# EAGLE board locker-pcb (EAGLE 6.0)
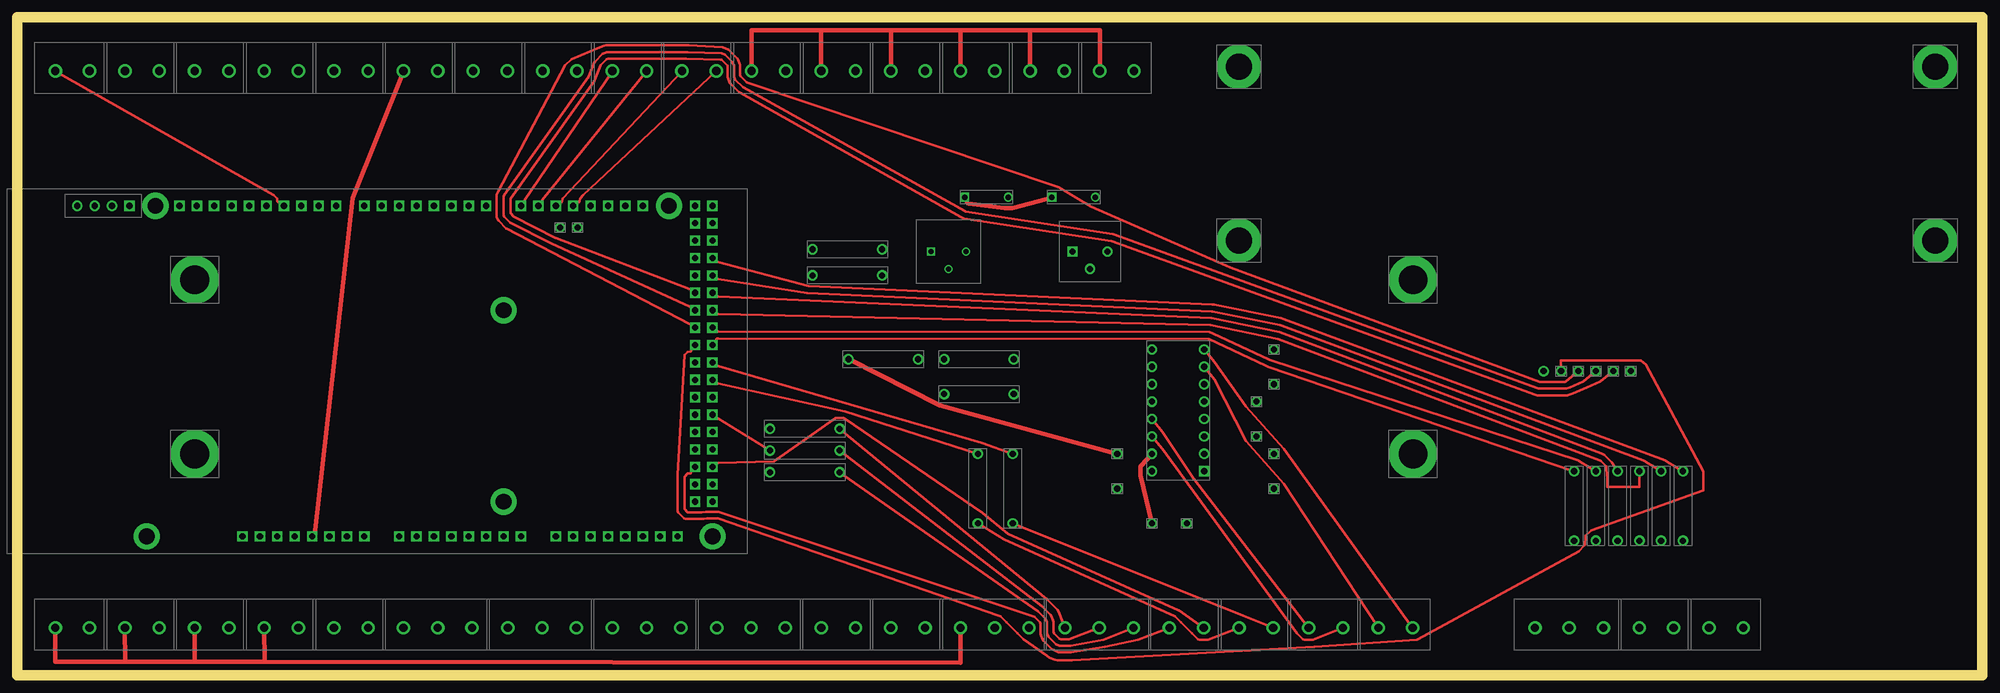
[diagram p0: board, top side]
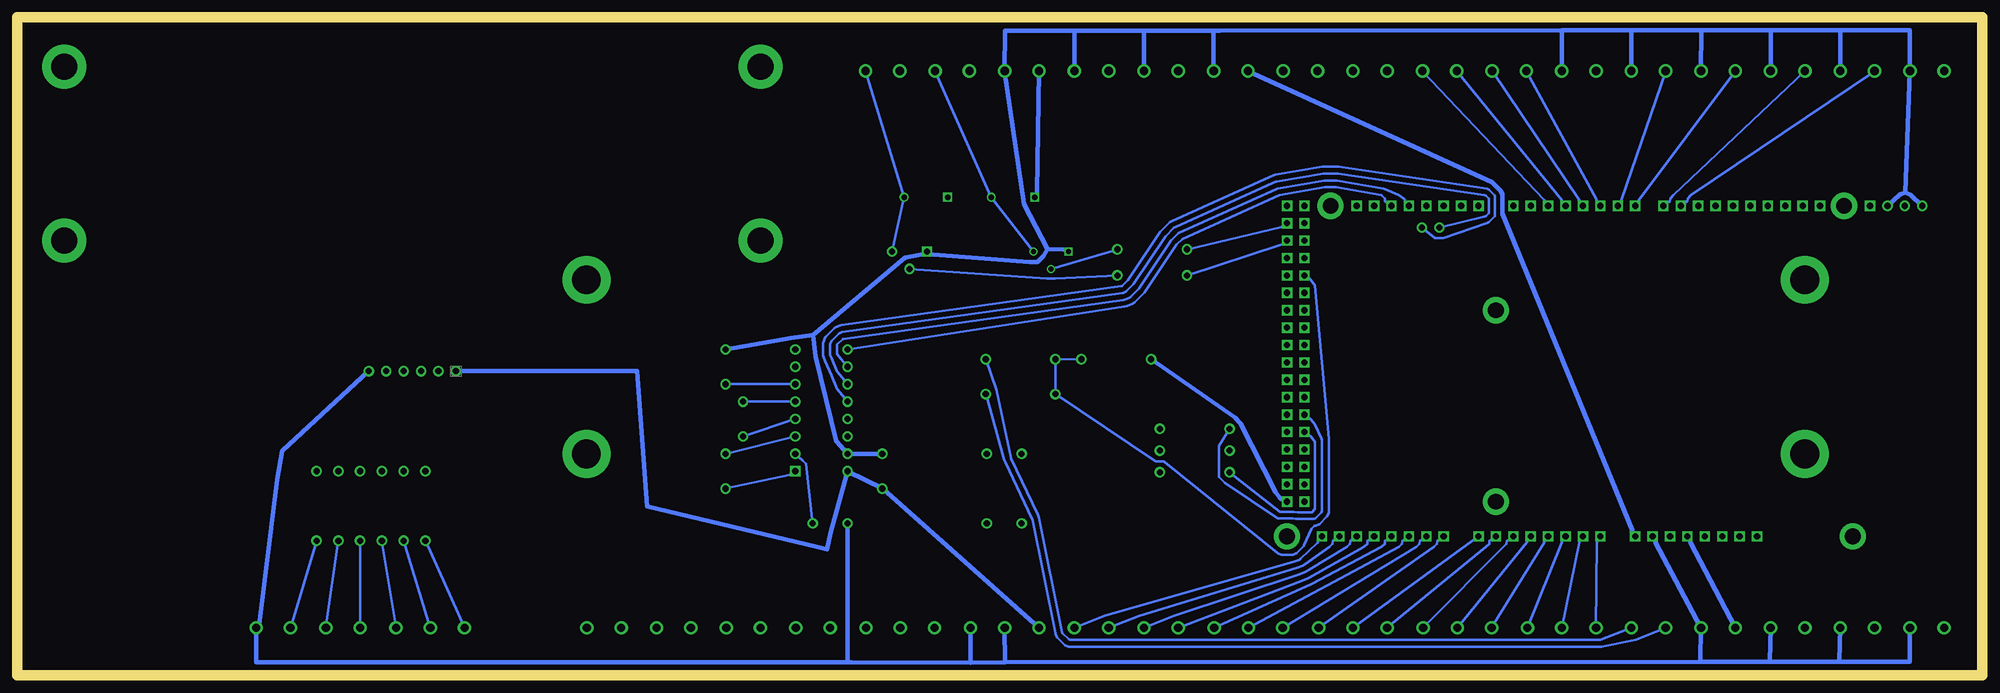
[diagram p1: board, bottom side, seen from below]

Size 286.76 x 96.11 mm. Coordinates in mm from the lower left corner, seen from the top.
Outline: 0,96.11 286.76,96.11 286.76,0 0,0 0,96.11
Outline: 0,96.11 0,96.11
Copper layers 1+16: Top 0.0035mm / dielectric 0.15mm / Bottom 0.0035mm
Design rules: minimum track width 0.4mm, track to track 0.4mm, copper to edge 0.3mm, minimum pad ring 0.1mm, minimum via ring 0.1mm
Net classes: 0 default: width 0.4 mm, clearance 0.4 mm; 1 NetGroup 0: width 0.66 mm, clearance 0.4 mm to class 0, clearance 0.4 mm

## Footprints (pad centres in the part's own frame; a part is rotated, then mirrored left to right if it is on the bottom)
691502710003_0-2 = drill 1.2 pad 1.95: 1 -4.75,-0.45; 2 0.25,-0.45; 3 5.25,-0.45
691502710002_1+2 = drill 1.2 pad 1.95: 1 -2.25,-0.45; 2 2.75,-0.45
691502710003_1-3 = drill 1.2 pad 1.95: 1 -4.75,-0.45; 2 0.25,-0.45; 3 5.25,-0.45
691502710002_3+4 = drill 1.2 pad 1.95: 1 -2.25,-0.45; 2 2.75,-0.45
691502710003_3-5 = drill 1.2 pad 1.95: 1 -4.75,-0.45; 2 0.25,-0.45; 3 5.25,-0.45
691502710002_4+5 = drill 1.2 pad 1.95: 1 -2.25,-0.45; 2 2.75,-0.45
691502710002_5V+/- = drill 1.2 pad 1.95: 1 -2.25,-0.45; 2 2.75,-0.45
691502710002_5V+/-#1$ = drill 1.2 pad 1.95: 1 -2.25,-0.45; 2 2.75,-0.45
691502710002_5V+/-#2$ = drill 1.2 pad 1.95: 1 -2.25,-0.45; 2 2.75,-0.45
1 = drill 1.2 pad 1.95: 1 -2.25,-0.45; 2 2.75,-0.45
2 = drill 1.2 pad 1.95: 1 -2.25,-0.45; 2 2.75,-0.45
691502710003_5V+/-/- = drill 1.2 pad 1.95: 1 -4.75,-0.45; 2 0.25,-0.45; 3 5.25,-0.45
691502710002_6+GND = drill 1.2 pad 1.95: 1 -2.25,-0.45; 2 2.75,-0.45
691502710003_6-8 = drill 1.2 pad 1.95: 1 -4.75,-0.45; 2 0.25,-0.45; 3 5.25,-0.45
691502710003_9-11 = drill 1.2 pad 1.95: 1 -4.75,-0.45; 2 0.25,-0.45; 3 5.25,-0.45
691502710002_12-13 = drill 1.2 pad 1.95: 1 -2.25,-0.45; 2 2.75,-0.45
691502710002_12V+/- = drill 1.2 pad 1.95: 1 -2.25,-0.45; 2 2.75,-0.45
691502710002_12V+/-#1$ = drill 1.2 pad 1.95: 1 -2.25,-0.45; 2 2.75,-0.45
691502710002_12V+/-#2$ = drill 1.2 pad 1.95: 1 -2.25,-0.45; 2 2.75,-0.45
691502710002_14-15 = drill 1.2 pad 1.95: 1 -2.25,-0.45; 2 2.75,-0.45
ARDUINO@MEGA@2560_ARD1 = drill 0.9 pad 1.5 square: 1 48.895,-19.05; 2 48.895,-16.51; 3 48.895,-13.97; 4 48.895,-11.43; 5 48.895,-8.89; 6 48.895,-6.35; 7 48.895,-3.81; 8 48.895,-1.27; 9 48.895,1.27; 10 48.895,3.81; 11 48.895,6.35; 12 48.895,8.89; 13 48.895,11.43; 14 48.895,13.97; 15 48.895,16.51; 16 48.895,19.05; 17 48.895,21.59; 18 46.355,24.13; 19 46.355,-19.05; 20 46.355,-16.51; 21 46.355,-13.97; 22 46.355,-11.43; 23 46.355,-8.89; 24 46.355,-6.35; 25 46.355,-3.81; 26 46.355,-1.27; 27 46.355,1.27; 28 46.355,3.81; 29 46.355,6.35; 30 46.355,8.89; 31 46.355,11.43; 32 46.355,13.97; 33 46.355,16.51; 34 46.355,19.05; 35 46.355,21.59; 36 48.895,24.13; 37 -6.985,-24.13; 38 -12.065,-24.13; 39 -14.605,-24.13; 40 -17.145,-24.13; 41 -19.685,-24.13; 42 15.875,-24.13; 43 13.335,-24.13; 44 10.795,-24.13; 45 8.255,-24.13; 46 5.715,-24.13; 47 3.175,-24.13; 48 -6.02,24.13; 49 -8.56,24.13; 50 -11.1,24.13; 51 -13.64,24.13; 52 -16.18,24.13; 53 -18.72,24.13; 54 -21.26,24.13; 55 -23.825,24.13; 56 -26.34,24.13; 57 -28.88,24.13; 58 15.875,24.13; 59 13.335,24.13; 60 10.795,24.13; 61 8.255,24.13; 62 5.715,24.13; 63 3.175,24.13; 64 0.635,24.13; 65 -1.905,24.13; 66 20.955,24.13; 67 23.495,24.13; 68 26.035,24.13; 69 28.575,24.13; 70 31.115,24.13; 71 33.655,24.13; 72 36.195,24.13; 73 38.735,24.13; 74 18.415,-24.13; 75 20.955,-24.13; 76 26.035,-24.13; 77 28.575,-24.13; 78 31.115,-24.13; 79 33.655,-24.13; 80 36.195,-24.13; 81 38.735,-24.13; 82 41.275,-24.13; 83 43.815,-24.13; 84 -9.525,-24.13; 85 -1.905,-24.13; 86 -4.445,-24.13 | drill 2.3 pad 3.81: 87 -33.655,-24.13; 88 -32.385,24.13; 89 18.415,-19.05; 90 18.415,8.89; 91 48.895,-24.13; 92 42.545,24.13
691502710002_but/sound = drill 1.2 pad 1.95: 1 -2.25,-0.45; 2 2.75,-0.45
DO-25_D1 = drill 0.8 pad 1.27 square: 1 -3.175,0 | drill 0.8 pad 1.27: 2 3.175,0
DO-25_D2 = drill 0.8 pad 1.27 square: 1 -3.175,0 | drill 0.8 pad 1.27: 2 3.175,0
691502710002_exit_but = drill 1.2 pad 1.95: 1 -2.25,-0.45; 2 2.75,-0.45
691502710002_ger_on = drill 1.2 pad 1.95: 1 -2.25,-0.45; 2 2.75,-0.45
691502710002_ger_open = drill 1.2 pad 1.95: 1 -2.25,-0.45; 2 2.75,-0.45
Hole_Hole1 = drill 3.8 pad 6.4: 2 0,0
Hole_Hole6 = drill 3.8 pad 6.4: 2 0,0
Hole_Hole7 = drill 3.8 pad 6.4: 2 0,0
Hole_Hole8 = drill 3.8 pad 6.4: 2 0,0
Hole_Hole11 = drill 4.2 pad 7: 3 0,0
Hole_Hole12 = drill 4.2 pad 7: 3 0,0
Hole_Hole13 = drill 4.2 pad 7: 2 0,0
Hole_Hole14 = drill 4.2 pad 7: 2 0,0
691502710002_input = drill 1.2 pad 1.95: 1 -2.25,-0.45; 2 2.75,-0.45
691502710002_inside_sound = drill 1.2 pad 1.95: 1 -2.25,-0.45; 2 2.75,-0.45
691502710002_L+/L- = drill 1.2 pad 1.95: 1 -2.25,-0.45; 2 2.75,-0.45
691502710002_light_but = drill 1.2 pad 1.95: 1 -2.25,-0.45; 2 2.75,-0.45
691502710002_none = drill 1.2 pad 1.95: 1 -2.25,-0.45; 2 2.75,-0.45
Pad_Pad1 = drill 0.9 pad 1.5: 1 0,0
Pad_Pad2 = drill 0.9 pad 1.5: 1 0,0
Pad_Pad3 = drill 0.9 pad 1.5: 1 0,0
Pad_Pad4 = drill 0.9 pad 1.5: 1 0,0
Pad_Pad5 = drill 0.9 pad 1.5: 1 0,0
Pad_Pad6 = drill 0.9 pad 1.5: 1 0,0
Pad_Pad7 = drill 0.9 pad 1.5: 1 0,0
Pad_Pad8 = drill 0.9 pad 1.5: 1 0,0
Pad_Pad9 = drill 0.9 pad 1.5: 1 0,0
Pad_Pad10 = drill 0.9 pad 1.5: 1 0,0
Pad_Pad11 = drill 0.9 pad 1.5: 1 0,0
Pad_Pad12 = drill 0.9 pad 1.5: 1 0,0
Pad_Pad14 = drill 0.9 pad 1.5: 1 0,0
Pad_Pad15 = drill 0.9 pad 1.5: 1 0,0
Pad_Pad16 = drill 0.9 pad 1.5: 1 0,0
Pad_Pad17 = drill 0.9 pad 1.5: 1 0,0
Pad_Pad18 = drill 0.9 pad 1.5: 1 0,0
Pad_Pad19 = drill 0.9 pad 1.5: 1 0,0
691502710002_power = drill 1.2 pad 1.95: 1 -2.25,-0.45; 2 2.75,-0.45
RES-10.16/5.1x2.5_R1 = drill 0.9 pad 1.524: 1 5.08,0; 2 -5.08,0
RES-10.16/5.1x2.5_R2 = drill 0.9 pad 1.524: 1 5.08,0; 2 -5.08,0
RES-10.16/5.1x2.5_R3 = drill 0.9 pad 1.524: 1 5.08,0; 2 -5.08,0
RES-10.16/5.1x2.5_R4 = drill 0.9 pad 1.524: 1 5.08,0; 2 -5.08,0
RES-10.16/5.1x2.5_R5 = drill 0.9 pad 1.524: 1 5.08,0; 2 -5.08,0
RES-10.16/5.1x2.5_R6 = drill 0.9 pad 1.524: 1 5.08,0; 2 -5.08,0
RES-10.16/5.1x2.5_R7 = drill 0.9 pad 1.524: 1 5.08,0; 2 -5.08,0
RES-10.16/5.1x2.5_R8 = drill 0.9 pad 1.524: 1 5.08,0; 2 -5.08,0
RES-10.16/5.1x2.5_R9 = drill 0.9 pad 1.524: 1 5.08,0; 2 -5.08,0
RES-10.16/5.1x2.5_R10 = drill 0.9 pad 1.524: 1 5.08,0; 2 -5.08,0
RES-10.16/5.1x2.5_R11 = drill 0.9 pad 1.524: 1 5.08,0; 2 -5.08,0
RES-10.16/5.1x2.5_R12 = drill 0.9 pad 1.524: 1 5.08,0; 2 -5.08,0
RES-10.16/5.1x2.5_R13 = drill 0.9 pad 1.524: 1 5.08,0; 2 -5.08,0
RES-10.16/5.1x2.5_R14 = drill 0.9 pad 1.524: 1 5.08,0; 2 -5.08,0
RES-10.16/5.1x2.5_R15 = drill 0.9 pad 1.524: 1 5.08,0; 2 -5.08,0
RES-10.16/5.1x2.5_R16 = drill 0.9 pad 1.524: 1 5.08,0; 2 -5.08,0
691502710002_R+/R- = drill 1.2 pad 1.95: 1 -2.25,-0.45; 2 2.75,-0.45
691502710003_R/G/B = drill 1.2 pad 1.95: 1 -4.75,-0.45; 2 0.25,-0.45; 3 5.25,-0.45
691502710002_TX1/RX1#S$ = drill 1.2 pad 1.95: 1 -2.25,-0.45; 2 2.75,-0.45
691502710002_TX2/RX2 = drill 1.2 pad 1.95: 1 -2.25,-0.45; 2 2.75,-0.45
691502710002_TX2/RX2#S$ = drill 1.2 pad 1.95: 1 -2.25,-0.45; 2 2.75,-0.45
691502710002_TX3/RX3 = drill 1.2 pad 1.95: 1 -2.25,-0.45; 2 2.75,-0.45
DIP-16_U1 = drill 0.9 pad 1.5 square: 1 -3.81,8.89 | drill 0.9 pad 1.5: 2 -3.81,6.35; 3 -3.81,3.81; 4 -3.81,1.27; 5 -3.81,-1.27; 6 -3.81,-3.81; 7 -3.81,-6.35; 8 -3.81,-8.89; 9 3.81,-8.89; 10 3.81,-6.35; 11 3.81,-3.81; 12 3.81,-1.27; 13 3.81,1.27; 14 3.81,3.81; 15 3.81,6.35; 16 3.81,8.89
TO-5_U2 = drill 0.7 pad 1.168: 1 2.54,0; 3 0,-2.54 | drill 0.7 pad 1.168 square: 2 -2.54,0
TO-39_U5 = drill 0.9 pad 1.5 square: 1 -2.54,0 | drill 0.9 pad 1.5: 2 0,-2.54; 3 2.54,0
_XP3 = drill 0.9 pad 1.5 square: 1 0,3.825 | drill 0.9 pad 1.5: 2 0,1.285; 3 0,-1.255; 4 0,-3.795

## Placement (x,y rotation side)
0-2  [691502710003_0-2]  61.12,7.42 0 top
1+2  [691502710002_1+2]  68.78,88.7 0 top
1-3  [691502710003_1-3]  226.22,7.42 0 top
3+4  [691502710002_3+4]  78.94,88.7 0 top
3-5  [691502710003_3-5]  76.36,7.42 0 top
4+5  [691502710002_4+5]  238.96,7.42 0 top
5V+/-  [691502710002_5V+/-]  7.82,7.42 0 top
5V+/-#1$  [691502710002_5V+/-#1$]  17.98,7.42 0 top
5V+/-#2$  [691502710002_5V+/-#2$]  28.14,7.42 0 top
5V+/-#2$1  [1]  38.3,7.42 0 top
5V+/-#2$2  [2]  48.46,7.42 0 top
5V+/-/-  [691502710003_5V+/-/-]  142.4,7.42 0 top
6+GND  [691502710002_6+GND]  249.12,7.42 0 top
6-8  [691502710003_6-8]  91.6,7.42 0 top
9-11  [691502710003_9-11]  106.84,7.42 0 top
12-13  [691502710002_12-13]  119.58,7.42 0 top
12V+/-  [691502710002_12V+/-]  119.58,88.7 0 top
12V+/-#1$  [691502710002_12V+/-#1$]  129.74,88.7 0 top
12V+/-#2$  [691502710002_12V+/-#2$]  139.9,88.7 0 top
14-15  [691502710002_14-15]  129.74,7.42 0 top
ARD1  [ARDUINO@MEGA@2560_ARD1]  52.56,44.43 0 top
but/sound  [691502710002_but/sound]  170.38,7.42 0 top
D1  [DO-25_D1]  141.46,69.83 0 top
D2  [DO-25_D2]  154.16,69.83 0 top
exit_but  [691502710002_exit_but]  17.98,88.7 0 top
ger_on  [691502710002_ger_on]  38.3,88.7 0 top
ger_open  [691502710002_ger_open]  48.46,88.7 0 top
Hole1  [Hole_Hole1]  279.89,63.48 180 top
Hole6  [Hole_Hole6]  279.89,88.88 180 top
Hole7  [Hole_Hole7]  178.29,88.88 180 top
Hole8  [Hole_Hole8]  178.29,63.48 180 top
Hole11  [Hole_Hole11]  25.89,57.77 0 top
Hole12  [Hole_Hole12]  25.89,32.37 0 top
Hole13  [Hole_Hole13]  203.69,57.77 0 top
Hole14  [Hole_Hole14]  203.69,32.37 0 top
input  [691502710002_input]  109.42,88.7 0 top
inside_sound  [691502710002_inside_sound]  28.14,88.7 0 top
L+/L-  [691502710002_L+/L-]  150.06,88.7 0 top
light_but  [691502710002_light_but]  7.82,88.7 0 top
none  [691502710002_none]  180.54,7.42 0 top
Pad1  [Pad_Pad1]  183.37,27.29 0 top
Pad2  [Pad_Pad2]  183.37,32.37 0 top
Pad3  [Pad_Pad3]  180.83,39.99 0 top
Pad4  [Pad_Pad4]  180.83,34.91 0 top
Pad5  [Pad_Pad5]  183.37,42.53 0 top
Pad6  [Pad_Pad6]  183.37,47.61 0 top
Pad7  [Pad_Pad7]  160.51,27.29 0 top
Pad8  [Pad_Pad8]  160.51,32.37 0 top
Pad9  [Pad_Pad9]  165.59,22.21 0 top
Pad10  [Pad_Pad10]  170.67,22.21 0 top
Pad11  [Pad_Pad11]  79.23,65.39 0 top
Pad12  [Pad_Pad12]  81.77,65.39 0 top
Pad14  [Pad_Pad14]  235.44,44.43 180 top
Pad15  [Pad_Pad15]  222.74,44.43 180 bottom
Pad16  [Pad_Pad16]  232.9,44.43 180 top
Pad17  [Pad_Pad17]  230.36,44.43 180 top
Pad18  [Pad_Pad18]  227.82,44.43 180 top
Pad19  [Pad_Pad19]  225.28,44.43 180 top
power  [691502710002_power]  58.62,88.7 0 top
R1  [RES-10.16/5.1x2.5_R1]  227.19,24.75 270 top
R2  [RES-10.16/5.1x2.5_R2]  230.36,24.75 270 top
R3  [RES-10.16/5.1x2.5_R3]  233.54,24.75 270 top
R4  [RES-10.16/5.1x2.5_R4]  236.71,24.75 270 top
R5  [RES-10.16/5.1x2.5_R5]  239.89,24.75 270 top
R6  [RES-10.16/5.1x2.5_R6]  243.06,24.75 270 top
R7  [RES-10.16/5.1x2.5_R7]  121.14,58.4 180 top
R8  [RES-10.16/5.1x2.5_R8]  121.14,62.21 0 top
R9  [RES-10.16/5.1x2.5_R9]  114.94,36.01 180 top
R10  [RES-10.16/5.1x2.5_R10]  114.94,32.83 180 top
R11  [RES-10.16/5.1x2.5_R11]  114.94,29.66 180 top
R12  [RES-10.16/5.1x2.5_R12]  140.19,27.29 270 top
R13  [RES-10.16/5.1x2.5_R13]  145.27,27.29 270 top
R14  [RES-10.16/5.1x2.5_R14]  126.38,46.18 0 top
R15  [RES-10.16/5.1x2.5_R15]  140.34,46.17 180 top
R16  [RES-10.16/5.1x2.5_R16]  140.34,41.09 180 top
R+/R-  [691502710002_R+/R-]  160.22,88.7 0 top
R/G/B  [691502710003_R/G/B]  157.64,7.42 0 top
TX1/RX1#S$  [691502710002_TX1/RX1#S$]  190.7,7.42 0 top
TX2/RX2  [691502710002_TX2/RX2]  99.26,88.7 0 top
TX2/RX2#S$  [691502710002_TX2/RX2#S$]  200.86,7.42 0 top
TX3/RX3  [691502710002_TX3/RX3]  89.1,88.7 0 top
U1  [DIP-16_U1]  169.4,38.72 180 top
U2  [TO-5_U2]  135.91,61.89 0 top
U5  [TO-39_U5]  156.54,61.89 0 top
XP3  [_XP3]  12.56,68.56 270 top

## Library data of the parts
0-2 1+2 1-3 3+4 3-5 4+5 5V+/- 5V+/-/- 6+GND 6-8 9-11 12-13 12V+/- 14-15 ARD1 but/sound D1 D2 exit_but ger_on ger_open Hole1 Hole6-Hole8 Hole11-Hole14 input inside_sound L+/L- light_but none Pad1-Pad12 Pad14-Pad19 power R1-R16 R+/R- R/G/B TX2/RX2 TX3/RX3 U1 U2 U5 XP3 = TopoR
5V+/-#1$ = 691502710002_5V+/-#1
5V+/-#2$ 5V+/-#2$1 5V+/-#2$2 = 691502710002_5V+/-#2
12V+/-#1$ = 691502710002_12V+/-#1
12V+/-#2$ = 691502710002_12V+/-#2
TX1/RX1#S$ = 691502710002_TX1/RX1#S
TX2/RX2#S$ = 691502710002_TX2/RX2#S

## Nets
5V [NetGroup 0]: 5V+/-#1$.1 5V+/-#2$1.1 5V+/-#2$.1 5V+/-.1 5V+/-/-.1 ARD1.84 Pad7.1 Pad15.1 power.1 U1.16
12V [NetGroup 0]: 12V+/-#1$.1 12V+/-#2$.1 12V+/-.1 ARD1.85 D1.1 D2.1 input.1 L+/L-.1 R+/R-.1
button_exit: ARD1.48 inside_sound.1
gerkon_on: ARD1.65 ger_on.1
gerkon_open: ARD1.64 ger_open.1
GND [NetGroup 0]: 5V+/-#1$.2 5V+/-#2$1.2 5V+/-#2$.2 5V+/-.2 5V+/-/-.2 5V+/-/-.3 6+GND.2 12V+/-#1$.2 12V+/-#2$.2 12V+/-.2 ARD1.1 ARD1.86 exit_but.2 ger_on.2 ger_open.2 input.2 inside_sound.2 light_but.2 Pad6.1 Pad8.1 Pad9.1 Pad14.1 power.2 R14.2 U1.15 U2.2 U5.1 XP3.2 XP3.4
Locker@-: D1.2 L+/L-.2 U2.1
Net@0: ARD1.49 exit_but.1
Net@1: ARD1.15 R6.2
Net@2: R9.2 R/G/B.1
Net@3: R10.2 R/G/B.2
Net@4: R7.2 U5.2
Net@5: ARD1.16 R7.1
Net@6: D2.2 R+/R-.2 U5.3
Net@7: 1-3.2 R2.1
Net@8: ARD1.17 R8.2
Net@9: 1-3.1 R1.1
Net@10: 1+2.1 ARD1.63
Net@11: 1+2.2 ARD1.62
Net@12: 3+4.1 ARD1.61
Net@13: 3+4.2 ARD1.60
Net@14: 14-15.2 ARD1.83
Net@15: 14-15.1 ARD1.82
Net@16: ARD1.66 TX3/RX3.1
Net@17: ARD1.67 TX3/RX3.2
Net@18: Pad1.1 U1.1
Net@19: ARD1.68 TX2/RX2.1
Net@20: ARD1.69 TX2/RX2.2
Net@21: R11.2 R/G/B.3
Net@22: Pad2.1 U1.3
Net@23: Pad4.1 U1.4
Net@24: Pad3.1 U1.5
Net@25: Pad5.1 U1.6
Net@26: 5V+/-#2$2.1 R16.2
Net@27: ARD1.8 R12.2
Net@28: ARD1.21 but/sound.1
Net@29: ARD1.6 R10.1
Net@30: ARD1.3 but/sound.2
Net@31: Pad10.1 U1.2
Net@32: ARD1.24 R9.1
Net@33: ARD1.32 R14.1 R15.1 R16.1
Net@34: 4+5.1 R4.1
Net@35: R8.1 U2.3
Net@36: ARD1.51 light_but.1
Net@37: ARD1.23 R11.1
Net@38: 5V+/-#2$2.2 R15.2
Net@39: ARD1.14 R5.2
Net@43: 1-3.3 R3.1
Net@44: ARD1.11 R2.2
Net@45: 4+5.2 R5.1
Net@47: ARD1.13 R3.2
Net@48: ARD1.12 R4.2
Net@49: ARD1.10 R1.2
Net@51: 6+GND.1 R6.1
Net@53: 12-13.2 ARD1.81
Net@54: 12-13.1 ARD1.80
Net@55: 9-11.2 ARD1.78
Net@56: 9-11.3 ARD1.79
Net@57: 9-11.1 ARD1.77
Net@58: 6-8.3 ARD1.76
Net@59: 6-8.2 ARD1.75
Net@60: 6-8.1 ARD1.74
Net@61: 3-5.3 ARD1.42
Net@62: 3-5.2 ARD1.43
Net@63: 3-5.1 ARD1.44
Net@64: 0-2.3 ARD1.45
Net@65: 0-2.2 ARD1.46
Net@66: 0-2.1 ARD1.47
Net@68: TX1/RX1#S$.2 U1.14
Net@69: TX1/RX1#S$.1 U1.13
Net@70: TX2/RX2#S$.2 U1.8
Net@71: TX2/RX2#S$.1 U1.7
Net@72: Pad11.1 U1.11
Net@73: Pad12.1 U1.12
Net@74: ARD1.70 U1.10
Net@75: ARD1.71 U1.9
Net@77: none.1 R12.1
Net@78: none.2 R13.1
Net@79: ARD1.9 R13.2
Net@80: ARD1.31 Pad16.1
Net@81: ARD1.30 Pad17.1
Net@82: ARD1.29 Pad18.1
Net@83: ARD1.28 Pad19.1

## Tracks (layer width: path | path; a pad name or v marks a point on that pad's centre or on a via)
5V
  Top 0.66: 5V+/-#1$.1 15.78,2.01 | 15.78,2.01 25.93,2 | 5V+/-#2$.1 25.93,2 | 25.93,2 36.09,1.99 | 5V+/-#2$1.1 36.09,1.99 | 5V+/-/-.1 137.65,1.88 36.09,1.99 | 15.78,2.01 5.58,2.02 5V+/-.1 | power.1 48.98,69.7 43.46,21.19 43.46,21.05 43.46,20.72 ARD1.84
  Bottom 0.66: Pad15.1 200.95,44.44 196.33,44.44 194.86,24.68 170.05,18.79 168.55,18.41 168.07,20.82 U1.16 Pad7.1 5V+/-/-.1 | ARD1.84 42.62,19.88 42.62,19.55 42.62,19.42 5V+/-#2$1.1
12V
  Top 0.66: input.1 107.17,94.16 117.34,94.17 | R+/R-.1 157.98,94.18 147.81,94.17 | L+/L-.1 147.81,94.17 | 12V+/-#2$.1 137.66,94.17 | 137.66,94.17 147.81,94.17 | 12V+/-#1$.1 127.5,94.17 | 127.5,94.17 137.66,94.17 | 12V+/-.1 117.34,94.17 | 117.34,94.17 127.5,94.17 | D2.1 150.68,69.53 150.35,69.53 150.22,69.53 145.22,68.27 144.05,68.27 138.78,68.87 138.59,69.06 138.59,69.2 138.59,69.53 D1.1
  Bottom 0.66: ARD1.85 51.08,20.72 51.08,21.05 51.08,21.19 70.05,67.46 70.05,70.14 70.06,70.21 70.28,70.73 70.32,70.79 71.48,71.96 71.55,72 input.1 | D1.1 137.98,70.14 137.98,70.47 137.98,70.6 12V+/-#2$.1
button_exit
  Bottom 0.4: inside_sound.1 45.08,70.11 45.55,69.64 45.59,69.23 45.71,69.11 45.79,69.11 45.99,69.11 ARD1.48
gerkon_on
  Bottom 0.4: ger_on.1 50.11,69.39 50.11,69.31 50.11,69.11 ARD1.65
gerkon_open
  Bottom 0.4: ger_open.1 52.65,69.39 52.65,69.31 52.65,69.11 ARD1.64
GND
  Top 0.66: U1.15 163.97,30.59 163.91,30.44 163.91,29.22 Pad9.1 | Pad8.1 134.64,39.4 134.49,39.46 R14.2
  Bottom 0.66: 12V+/-.2 122.34,94.11 | 132.49,94.11 142.64,94.11 12V+/-#2$.2 139.85,68.81 136.4,62.27 | 12V+/-#1$.2 132.49,94.11 | 122.34,94.11 132.49,94.11 | 122.34,94.11 112.18,94.12 | exit_but.2 20.72,94.2 | 20.72,94.2 10.57,94.18 light_but.2 11.23,70.5 | inside_sound.2 30.89,94.19 | 30.89,94.19 20.72,94.2 | ger_on.2 41.04,94.18 | 41.04,94.18 30.89,94.19 | ger_open.2 51.2,94.17 | 51.2,94.17 41.04,94.18 | power.2 61.36,94.19 | 61.36,94.19 51.2,94.17 | 5V+/-.2 10.56,2.02 20.86,2.01 | 5V+/-/-.3 147.67,1.9 | 5V+/-/-.2 142.65,1.9 | 147.67,1.9 142.65,1.9 | 6+GND.2 251.87,6.62 | 31.01,2 41.16,1.99 | 20.86,2.01 31.01,2 | 41.16,1.99 142.65,1.9 | 251.87,6.62 251.88,1.9 234.51,1.9 165.61,1.9 | 165.61,1.9 165.04,1.9 147.67,1.9 | 112.18,94.12 111.23,94.12 61.36,94.19 | Pad8.1 U1.15 167.21,34.15 167.27,34.3 170.27,46.56 170.62,49.73 | ARD1.1 101.88,25.8 102.21,25.8 102.34,25.8 102.54,26 103.14,26.79 108.23,36.78 109.09,37.64 R14.2 | Pad9.1 165.61,2.28 165.61,1.9 | 5V+/-#2$.2 31.01,2.15 31.01,2 | 5V+/-#1$.2 20.86,2.15 20.86,2.01 | 41.16,1.99 41.16,2.14 5V+/-#2$1.2 47.7,19.42 47.7,19.55 47.7,19.88 ARD1.86 | Pad6.1 173.82,49.29 170.62,49.73 | XP3.4 10.55,70.18 11.23,70.5 | 170.62,49.73 157.3,60.97 157.15,61.03 154.89,61.47 154.75,61.47 154.42,61.47 U5.1 153.58,61.47 153.25,61.47 153.12,61.47 139.02,60.38 137.87,60.38 137.78,60.42 136.97,61.23 136.4,62.27 | Pad14.1 248.07,32.76 248.81,28.63 251.53,6.82 251.73,6.62 251.87,6.62 | XP3.2 12.07,70.18 11.92,70.24 11.23,70.5 | U2.2 133.62,62.15 133.95,62.15 134.09,62.15 136.4,62.27 | input.2 112.18,94.12
Locker@-
  Bottom 0.4: L+/L-.2 D1.2 U2.1
Net@0
  Bottom 0.4: exit_but.1 42.54,70.11 43.01,69.64 43.05,69.23 43.17,69.11 43.25,69.11 43.45,69.11 ARD1.49
Net@1
  Top 0.4: R6.2 240.58,31.35 240.47,31.39 184.79,52.06 184.4,52.16 174.61,54.13 174.43,54.16 115.48,56.84 102.29,60.39 102.21,60.39 102.01,60.39 ARD1.15
Net@2
  Top 0.4: R9.2 150.28,11.09 151.77,9.6 152,9.22 152.32,8.45 R/G/B.1
Net@3
  Top 0.4: R10.2 149.52,10.11 150.8,8.84 150.9,8.67 151.15,8.07 151.19,7.87 151.19,6.35 151.26,6.2 152.12,5.33 152.28,5.27 153.5,5.27 R/G/B.2
Net@4
  Bottom 0.4: U5.2 136.46,57.97 135.35,57.97 R7.2
Net@5
  Bottom 0.4: R7.1 102.29,62.93 102.21,62.93 102.01,62.93 ARD1.16
Net@6
  Bottom 0.4: U5.3 D2.2 R+/R-.2
Net@7
  Bottom 0.4: R2.1 1-3.2
Net@8
  Bottom 0.4: R8.2 102.29,65.47 102.21,65.47 102.01,65.47 ARD1.17
Net@9
  Bottom 0.4: R1.1 1-3.1
Net@10
  Bottom 0.4: ARD1.63 56.29,69.11 56.29,69.31 56.29,69.39 1+2.1
Net@11
  Bottom 0.4: ARD1.62 58.83,69.11 58.83,69.31 58.83,69.39 1+2.2
Net@12
  Bottom 0.4: ARD1.61 61.37,69.11 61.37,69.31 61.37,69.39 3+4.1
Net@13
  Bottom 0.4: ARD1.60 63.91,69.11 63.91,69.31 63.91,69.39 3+4.2
Net@14
  Bottom 0.4: 14-15.2 128.12,8.74 100.31,16.65 99.69,16.91 99.49,17.03 97.04,19.35 96.93,19.47 96.93,19.55 96.93,19.75 ARD1.83
Net@15
  Bottom 0.4: 14-15.1 122.96,8.74 99.99,15.7 99.23,16.02 98.87,16.23 95.3,18.75 94.83,19.22 94.79,19.63 94.67,19.75 94.59,19.75 94.39,19.75 ARD1.82
Net@16
  Top 0.4: TX3/RX3.1 74.07,69.39 74.07,69.31 74.07,69.11 ARD1.66
Net@17
  Top 0.4: TX3/RX3.2 76.61,69.39 76.61,69.31 76.61,69.11 ARD1.67
Net@18
  Bottom 0.4: Pad1.1 174.05,29.28 173.96,29.28 173.76,29.28 U1.1
Net@19
  Top 0.4: TX2/RX2.1 79.59,69.64 79.55,69.23 79.43,69.11 79.35,69.11 79.15,69.11 ARD1.68
Net@20
  Top 0.4: TX2/RX2.2 82.59,70.11 82.13,69.64 82.09,69.23 81.97,69.11 81.89,69.11 81.69,69.11 ARD1.69
Net@21
  Top 0.4: R11.2 148.95,9.38 150.06,8.26 150.07,8.25 150.27,7.77 150.27,7.76 150.27,6.17 150.28,6.16 150.47,5.68 150.48,5.67 151.59,4.56 151.61,4.55 152.08,4.35 152.1,4.35 153.68,4.35 158.52,5.19 R/G/B.3
Net@22
  Bottom 0.4: Pad2.1 U1.3
Net@23
  Bottom 0.4: Pad4.1 U1.4
Net@24
  Bottom 0.4: Pad3.1 U1.5
Net@25
  Bottom 0.4: Pad5.1 U1.6
Net@26
  Bottom 0.4: R16.2 142.75,31.58 142.56,31.11 138.67,22.9 138.63,22.79 135.27,6.16 135.26,6.11 135.05,5.61 135.03,5.57 133.88,4.43 133.84,4.41 133.35,4.2 133.3,4.19 131.68,4.19 55.56,4.19 50.58,5.19 5V+/-#2$2.1
Net@27
  Top 0.4: R12.2 120.81,38.57 120.8,38.57 102.29,42.61 102.21,42.61 102.01,42.61 ARD1.8
Net@28
  Top 0.4: but/sound.1 163.52,5.19 158.7,4.19 153.8,3.42 151.99,3.42 151.79,3.47 151.19,3.72 151.02,3.82 149.75,5.1 149.65,5.27 149.4,5.87 149.35,6.06 149.35,7.58 149.28,7.74 148.42,8.6 148.27,8.66 102.57,23.84 102.37,23.89 100.55,23.89 99.86,23.84 98.5,23.83 97.84,23.83 97.37,24.3 97.37,24.96 97.37,29 97.84,29.47 98.25,29.51 98.37,29.63 98.37,29.71 98.37,29.91 ARD1.21
Net@29
  Top 0.4: R10.1 102.29,37.53 102.21,37.53 102.01,37.53 ARD1.6
Net@30
  Top 0.4: but/sound.2 169.53,9.5 169.49,9.52 144.58,20.69 140.88,23.73 120.71,37.53 120.6,37.57 119.43,37.57 119.32,37.53 110.55,31.32 110.44,31.27 102.29,31.01 102.21,31.01 102.01,31.01 ARD1.3
Net@31
  Bottom 0.4: Pad10.1 171.66,30.91 172.13,31.38 U1.2
Net@32
  Bottom 0.4: R9.1 111.37,33.53 111.42,33.42 111.42,30.25 111.42,29.07 111.37,28.97 110.55,28.14 102.97,23.01 102.82,22.95 100.66,22.95 100.16,22.84 98.9,22.84 97.76,22.84 97.53,22.84 97.34,22.92 96.46,23.81 96.37,24.02 96.37,25.29 96.37,34.39 96.45,34.58 97.37,36.62 97.97,37.42 98.08,37.53 98.17,37.53 98.37,37.53 ARD1.24
Net@33
  Bottom 0.4: R14.1 R15.1 R16.1 120.71,31.32 120.6,31.27 119.43,31.22 119.32,31.18 102.81,17.82 102.78,17.81 102.29,17.61 102.26,17.6 100.65,17.6 100.62,17.61 100.14,17.81 100.11,17.82 98.98,18.95 98.96,18.98 97.92,21.38 97.46,21.85 97.35,21.85 97.31,21.86 96.81,22.07 96.77,22.09 95.62,23.23 95.61,23.25 95.59,23.29 95.38,23.79 95.37,23.84 95.37,25.47 95.37,34.57 97.37,56.94 97.97,57.73 98.08,57.85 98.17,57.85 98.37,57.85 ARD1.32
Net@34
  Bottom 0.4: 4+5.1 R4.1
Net@35
  Bottom 0.4: U2.3 R8.1
Net@36
  Top 0.4: light_but.1 37.46,70.11 37.93,69.64 37.97,69.23 38.09,69.11 38.17,69.11 38.37,69.11 ARD1.51
Net@37
  Bottom 0.4: R11.1 102.51,23.89 100.55,23.89 99.86,23.84 99.2,23.84 97.94,23.84 97.84,23.84 97.37,24.3 97.37,24.33 97.37,24.99 97.37,34.08 97.97,34.88 98.08,34.99 98.17,34.99 98.37,34.99 ARD1.23
Net@38
  Bottom 0.4: R15.2 143.85,41.68 141.75,31.78 141.71,31.67 137.82,23.46 137.63,23 137.63,22.99 134.27,6.34 134.19,6.15 133.31,5.27 133.12,5.19 131.86,5.19 55.74,5.19 5V+/-#2$2.2
Net@39
  Top 0.4: R5.2 237.41,31.35 237.3,31.39 184.47,51.11 184.28,51.16 174.41,53.15 174.35,53.16 115.28,55.84 102.29,57.85 102.21,57.85 102.01,57.85 ARD1.14
Net@43
  Bottom 0.4: R3.1 1-3.3
Net@44
  Top 0.4: R2.2 227.88,31.35 227.77,31.39 182.79,46.06 182.69,46.1 174.46,49.96 174,50.16 102.29,50.23 102.21,50.23 102.01,50.23 ARD1.11
Net@45
  Bottom 0.4: 4+5.2 R5.1
Net@47
  Top 0.4: R3.2 232.73,31.09 231.62,32.19 231.15,32.39 184.16,50.16 174.24,52.16 102.29,55.31 102.21,55.31 102.01,55.31 ARD1.13
Net@48
  Top 0.4: R4.2 236.71,27.54 232.01,27.53 232.02,29.13 231.98,29.24 231.92,30.41 231.88,30.52 231.06,31.35 230.95,31.39 183.96,49.16 174.12,51.16 102.29,52.77 102.21,52.77 102.01,52.77 ARD1.12
Net@49
  Top 0.4: R1.2 182.59,45.06 182.12,45.25 173.9,49.11 173.8,49.16 102.29,49.19 102.12,49.19 102.01,49.07 102.01,48.99 102.01,48.79 ARD1.10
Net@51
  Bottom 0.4: 6+GND.1 R6.1
Net@53
  Bottom 0.4: 12-13.2 117.96,8.74 99.66,14.76 98.8,15.11 98.76,15.13 98.29,15.41 92.76,18.75 92.29,19.22 92.25,19.63 92.13,19.75 92.05,19.75 91.85,19.75 ARD1.81
Net@54
  Bottom 0.4: 12-13.1 112.72,8.74 99.31,13.82 98.38,14.2 98.28,14.26 90.22,18.75 89.75,19.22 89.71,19.63 89.59,19.75 89.51,19.75 89.31,19.75 ARD1.80
Net@55
  Bottom 0.4: 9-11.2 85.14,18.75 84.67,19.22 84.63,19.63 84.51,19.75 84.43,19.75 84.23,19.75 ARD1.78
Net@56
  Bottom 0.4: 9-11.3 97.97,13.29 97.79,13.38 87.68,18.75 87.21,19.22 87.17,19.63 87.05,19.75 86.97,19.75 86.77,19.75 ARD1.79
Net@57
  Bottom 0.4: 9-11.1 82.59,18.75 82.13,19.22 82.09,19.63 81.97,19.75 81.89,19.75 81.69,19.75 ARD1.77
Net@58
  Bottom 0.4: 6-8.3 80.06,18.75 79.59,19.22 79.55,19.63 79.43,19.75 79.35,19.75 79.15,19.75 ARD1.76
Net@59
  Bottom 0.4: 6-8.2 74.35,19.75 74.27,19.75 74.07,19.75 ARD1.75
Net@60
  Bottom 0.4: 6-8.1 72.44,18.75 71.97,19.22 71.93,19.63 71.81,19.75 71.73,19.75 71.53,19.75 ARD1.74
Net@61
  Bottom 0.4: 3-5.3 69.43,19.22 69.39,19.63 69.27,19.75 69.19,19.75 68.99,19.75 ARD1.42
Net@62
  Bottom 0.4: 3-5.2 66.45,19.47 66.45,19.55 66.45,19.75 ARD1.43
Net@63
  Bottom 0.4: 3-5.1 63.91,19.47 63.91,19.55 63.91,19.75 ARD1.44
Net@64
  Bottom 0.4: 0-2.3 61.37,19.47 61.37,19.55 61.37,19.75 ARD1.45
Net@65
  Bottom 0.4: 0-2.2 58.83,19.47 58.83,19.55 58.83,19.75 ARD1.46
Net@66
  Bottom 0.4: 0-2.1 56.29,19.47 56.29,19.55 56.29,19.75 ARD1.47
Net@68
  Top 0.4: U1.14 167.1,33.05 186.75,6.15 187.64,5.27 187.82,5.19 189.08,5.19 TX1/RX1#S$.2
Net@69
  Top 0.4: U1.13 167.1,35.59 171.66,28.75 TX1/RX1#S$.1
Net@70
  Top 0.4: U1.8 174.72,45.75 179.32,39.3 184.88,33.05 TX2/RX2#S$.2
Net@71
  Top 0.4: U1.7 174.72,43.21 179.32,34.22 184.88,27.97 TX2/RX2#S$.1
Net@72
  Bottom 0.4: Pad11.1 72.64,67.01 72.46,67.08 72.04,67.51 72.04,68.11 72.04,69.61 72.46,70.04 72.64,70.11 94.06,73.27 96.16,73.27 103.02,72.11 103.07,72.1 103.57,71.89 117.77,65.47 117.94,65.37 119.22,64.09 123.86,57.14 124.96,56.04 124.97,56.04 125.43,55.84 125.44,55.84 166.38,50.16 166.84,49.96 167.95,48.86 168.14,48.39 168.14,46.82 167.95,46.35 167.1,44.38 U1.11
Net@73
  Bottom 0.4: Pad12.1 79.92,63.88 79.82,63.84 78.65,63.84 72.33,66.01 72.14,66.09 72.02,66.21 71.17,67.06 71.11,67.21 71.11,68.42 71.11,69.92 71.17,70.06 72.02,70.91 72.14,71.03 72.33,71.11 93.96,74.27 96.25,74.27 96.33,74.25 103.15,73.11 103.39,73.05 104.02,72.79 118.22,66.37 118.56,66.17 120.02,64.71 124.7,57.71 125.53,56.88 125.64,56.84 166.5,51.16 166.69,51.11 167.29,50.86 167.47,50.76 168.74,49.48 168.84,49.31 169.09,48.71 169.14,48.51 169.14,46.7 169.09,46.51 168.84,45.9 167.95,43.81 167.1,41.84 U1.12
Net@74
  Bottom 0.4: U1.10 167.1,46.92 167.14,47.02 167.14,48.19 167.1,48.29 166.28,49.11 166.18,49.16 125.31,54.84 125.12,54.89 124.51,55.14 124.34,55.24 123.06,56.52 118.43,63.47 117.32,64.58 103.03,71.03 102.84,71.11 96.03,72.27 94.18,72.27 87.37,71.11 87.18,71.03 85.14,70.11 84.34,69.51 84.23,69.39 84.23,69.31 84.23,69.11 ARD1.70
Net@75
  Bottom 0.4: U1.9 125.19,53.84 124.8,53.94 124.06,54.24 123.72,54.45 122.27,55.9 117.58,62.91 116.75,63.73 102.54,70.11 95.91,71.27 94.3,71.27 87.68,70.11 87.21,69.64 87.17,69.23 87.05,69.11 86.97,69.11 86.77,69.11 ARD1.71
Net@77
  Top 0.4: R12.1 144.02,19.84 168.94,8.67 169.83,7.78 171.43,6.15 172.32,5.27 172.5,5.19 173.76,5.19 none.1
Net@78
  Top 0.4: R13.1 178.92,8.74 none.2
Net@79
  Top 0.4: R13.2 140.78,33.93 102.29,45.15 102.21,45.15 102.01,45.15 ARD1.9
Net@80
  Top 0.4: Pad16.1 231.05,42.92 229.07,42.08 226.98,41.18 226.38,40.93 226.19,40.88 224.38,40.88 221.84,40.88 221.64,40.93 159.67,63.44 138.16,66.74 137.72,66.92 105.5,85.06 105.34,85.15 104.08,86.42 103.98,86.58 103.73,87.17 103.69,87.35 103.69,88.86 103.63,89 102.77,89.86 102.62,89.92 97.64,90.02 87.48,90.02 86.22,90.02 86.04,89.95 85.15,89.06 84.25,86.89 84.23,86.85 71.97,69.64 71.97,68.14 71.97,67.48 72.44,67.02 78.55,63.88 78.65,63.84 98.08,56.41 98.17,56.41 98.37,56.41 ARD1.31
Net@81
  Top 0.4: Pad17.1 228.51,42.92 226.53,42.08 226.06,41.88 224.5,41.88 221.96,41.88 159.87,64.44 138.36,67.74 138.29,67.77 105.91,85.86 105.9,85.87 104.79,86.97 104.79,86.98 104.59,87.45 104.59,87.46 104.59,89.03 104.59,89.04 104.4,89.51 104.39,89.52 103.28,90.63 102.81,90.83 102.8,90.83 97.82,91.02 87.66,91.02 86.04,91.02 86,91.01 85.5,90.8 85.46,90.78 84.32,89.64 84.29,89.6 83.39,87.43 71.06,70.13 70.98,69.94 70.98,68.44 70.98,67.18 71.06,66.99 71.95,66.1 77.98,63.03 98.08,53.87 98.17,53.87 98.37,53.87 ARD1.30
Net@82
  Top 0.4: Pad18.1 225.97,42.92 225.87,42.88 224.7,42.88 222.16,42.88 177.05,59.55 176.39,59.83 156.72,68.42 151.95,71.27 106.56,86.57 106.41,86.63 105.56,87.49 105.49,87.64 105.49,89.15 105.45,89.33 105.2,89.92 105.11,90.08 103.84,91.34 103.68,91.44 103.09,91.68 102.91,91.73 97.95,92.02 87.79,92.02 85.92,92.02 85.68,91.96 85.05,91.7 80.88,89.95 79.99,89.06 70.2,70.67 69.99,70.17 69.98,70.12 69.98,68.62 69.98,67 69.99,66.95 70.2,66.45 70.23,66.41 71.37,65.27 71.41,65.25 98.08,51.33 98.17,51.33 98.37,51.33 ARD1.29
Net@83
  Top 0.4: Pad19.1 225.25,45.98 228.41,45.98 236.03,45.98 236.93,45.97 237.66,45.37 246.02,29.79 246.03,27.93 246.02,27.05 229.67,21.19 228.84,20.36 228.8,20.25 228.75,19.08 228.7,18.97 227.88,18.15 204.43,5.27 204.24,5.19 189.26,4.19 153.95,2.19 151.83,2.19 151.41,2.3 150.64,2.62 150.26,2.84 146.84,5.27 145.95,6.15 144.35,7.78 143.47,8.67 143.28,8.74 102.27,22.94 102.25,22.95 100.66,22.95 100.16,22.84 98.8,22.83 97.53,22.83 97.34,22.91 96.45,23.8 96.37,24 96.37,25.27 96.37,29.3 97.37,46.78 97.84,47.25 98.25,47.29 98.37,47.41 98.37,47.49 98.37,47.69 ARD1.28